# Altium PCB PCB.PcbDoc
Units mm, origin at the board's own origin, x right, y up, seen from the top; angles counter-clockwise.
Board outline 77 x 47 mm, 2 copper layers (Top Layer, Bottom Layer); 17 components, 25 nets, 82 pads, 0 vias.
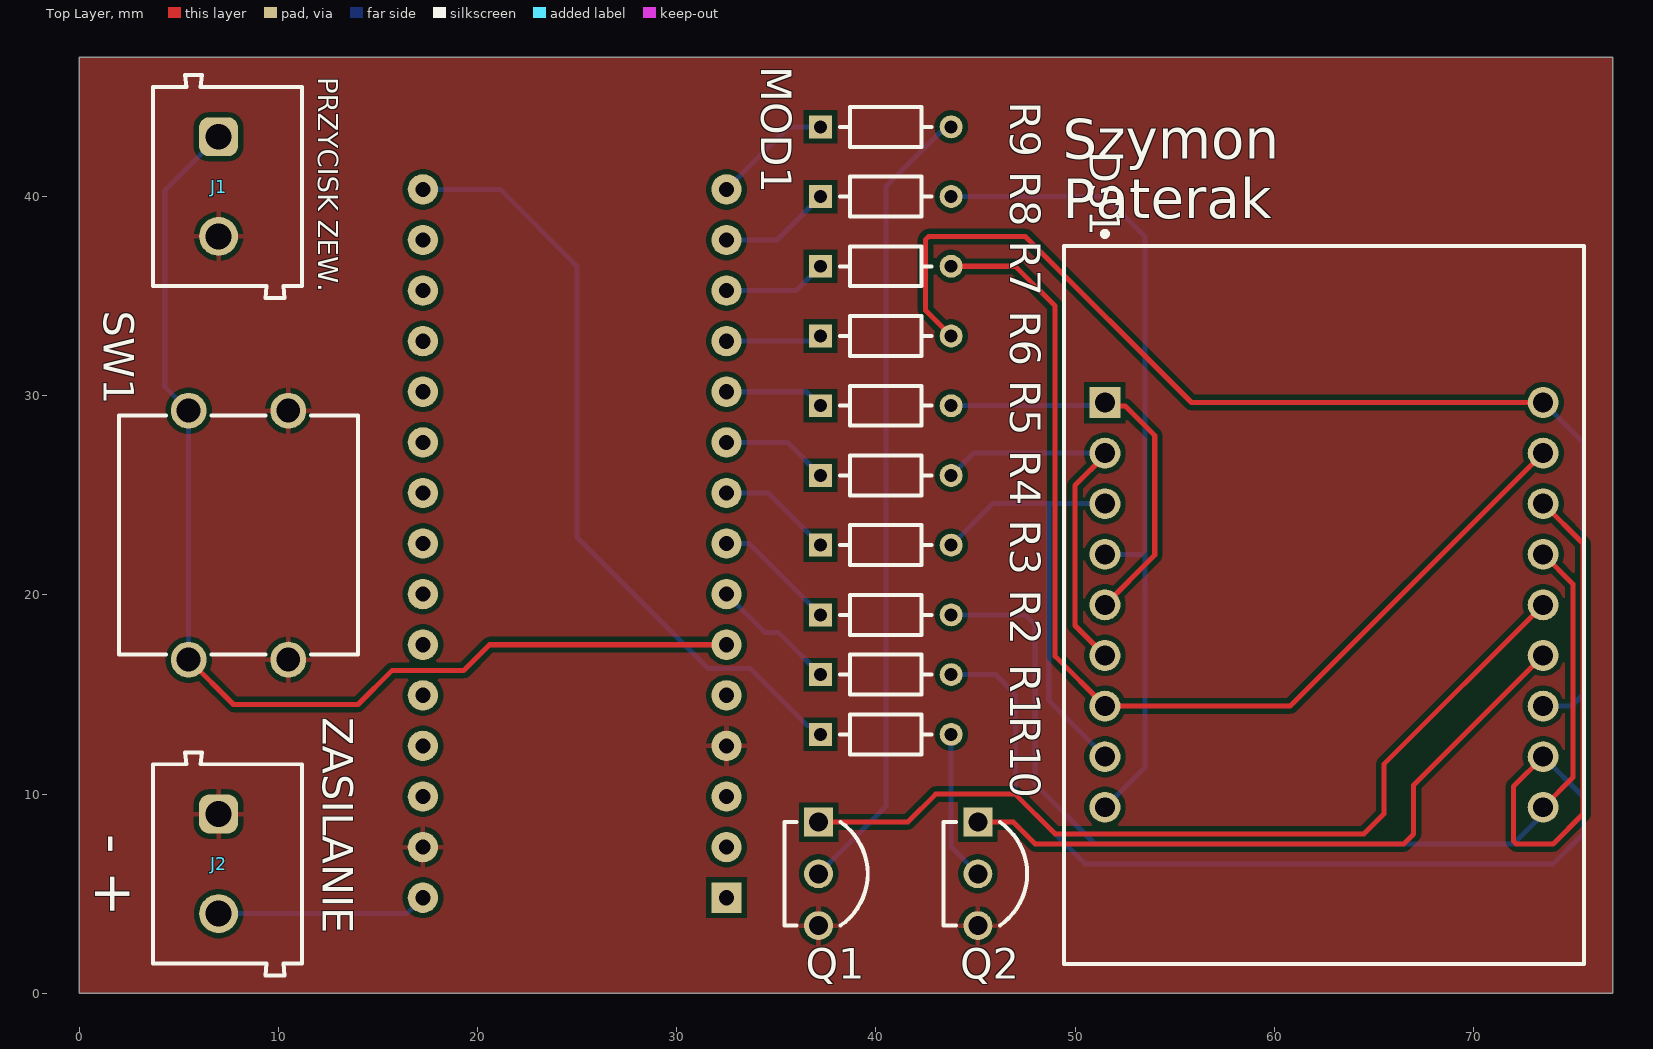
[diagram p0: Top Layer view]
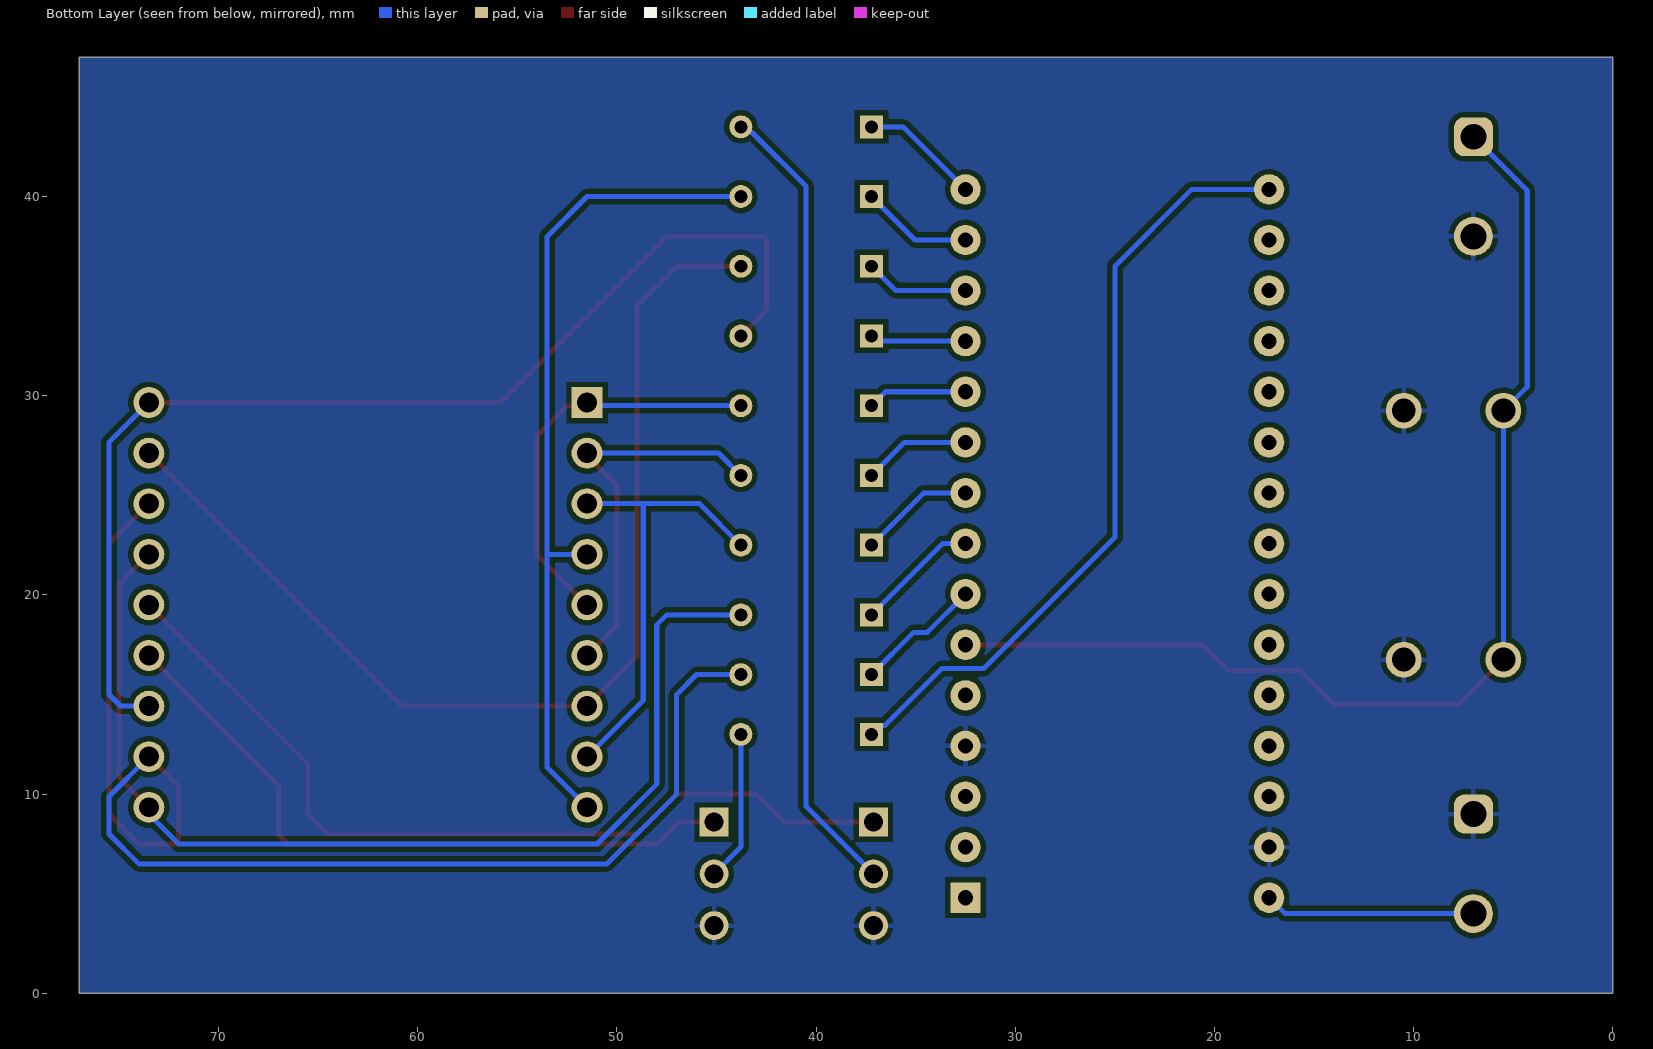
[diagram p1: Bottom Layer view, seen from below]
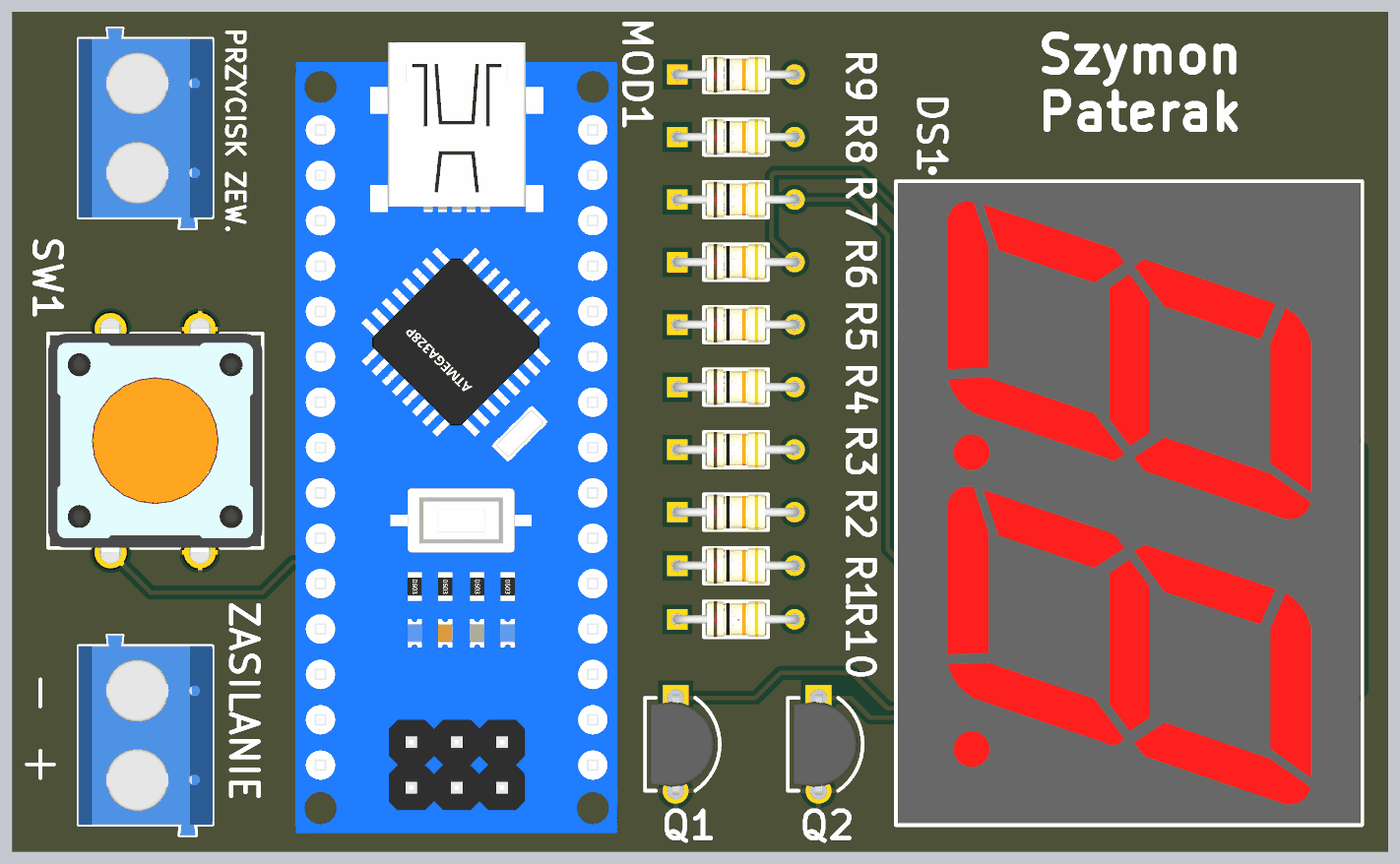
[diagram p2: 3D render of the assembled board from above, using the file's embedded part models]

## Layer stack, top to bottom
Top Solder: solder mask 0.0102, Solder Resist, Dk 3.5
Top Layer: signal copper 0.0356
Dielectric 1: dielectric 0.32, FR-4, Dk 4.8
Bottom Layer: signal copper 0.0356
Bottom Solder: solder mask 0.0102, Solder Resist, Dk 3.5

## Board outline
0,0 77,0 77,47 0,47

## Design rules (kind name [scope] priority, off if disabled: settings)
Clearance [All] p1: gap=0.254 ignorepadtopadclearanceinfootprint=FALSE except(0: Arc-Hole Track-Hole SMDPad-Hole THPad-Hole Via-Hole Fill-Hole Poly-Hole Region-Hole Text-Hole)
PolygonConnect [All] p1: connectstyle=Relief reliefconductorwidth=0.254 reliefentries=4 polygonreliefangle="90 Angle" airgapwidth=0.254
RoutingVias [All] p1: holewidth=0.711 width=1.27 viastyle="Through Hole" minholewidth=0.711 minwidth=1.27 maxholewidth=0.711 maxwidth=1.27
SolderMaskExpansion [All] p1: expansion=0.102 istentingtop=FALSE
Width [All] p1: maxlimit=0.254 minlimit=0.254 preferedwidth=0.254
30 further rules are at their usual default settings.

## Components (designator, comment, footprint, x,y, rotation, side; value= is the part's Value field where it differs from the comment)
DS1 "DC08-11SRWA" FP-DC08-11SRWA-MFG 62.5,19.5 r270 top
J1 "PRZYCISK ZEW." 691102710002 7.45,40.5 r270 top
J2 "ZASILANIE" 691102710002 7.45,6.5 r270 top
MOD1 "Arduino nano" "Arduino nano" 32.5,4.8 r90 top
Q1 "BC548CTA" FP-135AR-MFG 37.5,6 r0 top
Q2 "BC548CTA" FP-135AR-MFG 45.5,6 r0 top
R1 "1k" FP-CF18-MFG 40.5,16 r0 top value=10kΩ
R2 "1k" FP-CF18-MFG 40.5,19 r0 top value=10kΩ
R3 "1k" FP-CF18-MFG 40.5,22.5 r0 top value=10kΩ
R4 "1k" FP-CF18-MFG 40.5,26 r0 top value=10kΩ
R5 "1k" FP-CF18-MFG 40.5,29.5 r0 top value=10kΩ
R6 "1k" FP-CF18-MFG 40.5,33 r0 top value=10kΩ
R7 "1k" FP-CF18-MFG 40.5,36.5 r0 top value=10kΩ
R8 "1k" FP-CF18-MFG 40.5,40 r0 top value=10kΩ
R9 "1k" FP-CF18-MFG 40.5,43.5 r0 top value=10kΩ
R10 "1k" FP-CF18-MFG 40.5,13 r0 top value=10kΩ
SW1 "PRZYCISK" 4304x60437x6 8,23 r90 top

## Footprints (in the part's own frame and the unit in brackets; to place one, negate y for a bottom-side part, rotate by r counter-clockwise, add the part's x,y. Pads: shape width x height; smd on the part's side, far side on the other; paste and mask are expansions set on the pad)
4304x60437x6 [mm] "12x12mm washable Tact Switch, THT version"
  round 1.8 hole 1.2: A1(-6.25,2.5) A2(6.25,2.5) B1(-6.25,-2.5) B2(6.25,-2.5)
  silkscreen extent -6,-6 6,6, body extent -6.99,-6 6.99,6, height 4.35
691102710002 [mm] "5,00mm - modular - blue - Horizontal entry with pressure clamp - 9,9 mm height - 02p"
  rrect50% 1.95x1.95 hole 1.3: 1(-2.5,-0.45)
  round 1.95 hole 1.3: 2(2.5,-0.45)
  silkscreen extent -5.6,-3.75 5.6,3.75, body extent -5.6,-3.75 5.6,3.75, height 9.96
"Arduino nano" [mil] "arduino nano"
  rect 60x60 hole 30: 0(0,0)
  round 60 hole 30: 1(100,0) 2(200,0) 3(300,0) 4(400,0) 5(500,0) 6(600,0) 7(700,0) 8(800,0) 9(900,0) 10(1000,0) 11(1100,0) 12(1200,0) 13(1300,0) 14(1400,0) 15(1400,600) 16(1300,600) 17(1200,600) 18(1100,600) 19(1000,600) 20(900,600) 21(800,600) 22(700,600) 23(600,600) 24(500,600) 25(400,600) 26(300,600) 27(200,600) 28(100,600) 29(0,600)
  body extent -149,-54 1595,655, height 66
FP-135AR-MFG [mm]
  rect 1.45x1.45 hole 0.95 paste-2539.97 mask+0: 1(-0.38,2.6)
  round 1.45 hole 0.95 paste-2539.97 mask+0: 2(-0.38,0) 3(-0.38,-2.6)
  silkscreen extent -2.09,-2.6 2.09,2.6, body extent -2.19,-3.42 2.19,3.42, height 0.25
FP-CF18-MFG [mm]
  rect 1.15x1.15 hole 0.65 paste-2539.97 mask+0: 1(-3.28,0)
  round 1.15 hole 0.65 paste-2539.97 mask+0: 2(3.28,0)
  silkscreen extent -2.3,-1 2.3,1, body extent -3.96,-1.1 3.96,1.1, height 0.25
FP-DC08-11SRWA-MFG [mm]
  rect 1.55x1.55 hole 1 paste-2539.97 mask+0: 1(-10.16,-11)
  round 1.55 hole 1 paste-2539.97 mask+0: 2(-7.62,-11) 3(-5.08,-11) 4(-2.54,-11) 5(0,-11) 6(2.54,-11) 7(5.08,-11) 8(7.62,-11) 9(10.16,-11) 10(10.16,11) 11(7.62,11) 12(5.08,11) 13(2.54,11) 14(0,11) 15(-2.54,11) 16(-5.08,11) 17(-7.62,11) 18(-10.16,11)
  silkscreen extent -18.75,-13.05 18.03,13.05, body extent -18.13,-13.15 18.13,13.15, height 0.25

## Part data
DS1: library part CMP-44525-000001-1, "DISPLAY 660NM RED 2DIG 0.8\" 7SEG", Forward Current=20mA, Forward Voltage=1.85V, Manufacturer=Kingbright, Power Dissipation=75mW, Reverse Voltage=5V, Temperature="-40°C to +85°C", Temperature Range High=+85°C, Temperature Range Low=-40°C, Automotive=No, Category=Disp, ComponentLink2Description=Datasheet, ComponentLink2URL=https://www.kingbrightusa.com/images/catalog/SPEC/DC08-11SRWA.pdf, Device Class L1=Optoelectronics, Device Class L2=Displays, Device Class L3="LED Displays", Digikey Description="DISPLAY 660NM RED 2DIG 0.8\" 7SEG", Display Type=LED, Element Config="Common Cathode", Height=10.25mm, Lead Free=Yes, Luminous Intensity=32mcd, Manufacturer Part Number=DC08-11SRWA, Mouser Description="LED Displays & Accessories Dual Red 640nm Common Cathode", Octopart=https://octopart.com/dc08-11srwa-kingbright-55457135, Package=DC08-11SRWA, RoHS=TRUE, Test Current=20mA, Wavelength=640nm
J1 J2: library part CMP-1502-03258-2, Color=Blue, Current=15A, Max Operating Temperature=105°C, Min Operating Temperature=-40°C, Voltage=300V, Contact Material=Brass, Contact Plating=Tin, Current Rating=15A, Height=13.4mm, Housing Material=Nylon, Lead Pitch=5mm, Length=7.5mm, Mount="Through Hole", NexarPartId=8917706, Number Of Contacts=2, Number of Levels=1, Number of Pins=2, Number of Positions Per Level=2, Packaging=Box, Pitch=5.0038mm, Plating=Steel, REACH SVHC=Unknown, RoHS=Compliant, Stripping Length=-6mm, Termination=Screw, Voltage Rating=300V, Width=11.2mm, Wire Gauge (Max)=22AWG, Wire Gauge (Min)=14AWG, Wire/Cable Gauge=22AWG
MOD1: library part Arduino_nano
Q1 Q2: library part CMP-00278-84324566-1, "BC548CTA Small Signal Bipolar Transistor, 0.1A I(C), 30V V(BR)CEO, 1-Element, NPN, Silicon, TO-92", Case/Package=TO-92, Collector Base Voltage (VCBO)=30V, Collector Emitter Saturation Voltage=250mV, Current Rating=100mA, Emitter Base Voltage (VEBO)=5V, Frequency=300MHz, Manufacturer Lifecycle Status=ACTIVE, Max Junction Temperature (Tj)=150°C, Max Power Dissipation=500mW, Min Operating Temperature=-65°C, Collector Emitter Breakdown Voltage=30V, Collector Emitter Voltage (VCEO)=30V, Contact Plating=Tin, Element Configuration=Single, Gain Bandwidth Product=300MHz, Height=4.58mm, hFE Min=110, Lead Free="Lead Free", Length=4.58mm, Lifecycle Status=Production, Max Breakdown Voltage=30V, Max Collector Current=100mA, Max Frequency=300MHz, Max Operating Temperature=150°C, Mount="Through Hole", NexarPartId=84324566, Number of Elements=1, Number of Pins=3, Polarity=NPN, Power Dissipation=500mW, Radiation Hardening=No, REACH SVHC="No SVHC", RoHS=Compliant, Schedule B="8541210080, 8541210080", Transition Frequency=300MHz, Voltage Rating (DC)=30V, Weight=240mg, Width=3.86mm
R1 R2 R3 R4 R5 R6 R7 R8 R9 R10: library part CMP-26528-000002-1, "RES 10K OHM 1/8W 5% CF AXIAL", Manufacturer="Stackpole Electronics", Manufacturer Part Number=CF18JT10K0, Package=CF18, Power Rating=0.125W, Resistance=10kΩ, Temperature="-55°C to +155°C", Temperature Coefficient=0-500ppm/°C, Temperature Range High=+155°C, Temperature Range Low=-55°C, Tolerance=5%, Voltage Rating=250V, Automotive=No, Category=Res, ComponentLink2Description=Datasheet, ComponentLink2URL=http://www.seielect.com/Catalog/SEI-CF_CFM.pdf, Composition="Carbon Film", Device Class L1="Passive Components", Device Class L2=Resistors, Device Class L3="Through-Hole Resistors", Digikey Description="RES 10K OHM 1/8W 5% CF AXIAL", Height=2mm, Ipc Land Pattern Name=RESAD656W65L360D200, Lead Free=Yes, Octopart=https://octopart.com/cf18jt10k0-stackpole+electronics-19205642, RoHS=TRUE, Series=CF
SW1: library part CMP-1456-00007-2, Contact Current Rating=50mA, Insulation Resistance=100MΩ, Max Operating Temperature=85°C, Min Operating Temperature=-40°C, Voltage Rating=12V, Actuator Length=800µm, Actuator Material="Liquid Crystal Polymer, Polymer", Contact Material="Silver, Stainless Steel", Contact Plating=Silver, Current Rating=50mA, Height=4.3mm, Illumination Type="Illuminated, Non-Illuminated", Mechanical Life=500kcycles, Mount="Through Hole", NexarPartId=31136478, Packaging=Bulk, REACH SVHC="No SVHC", RoHS=Compliant, Switch Function=Off-Mom, Switch Travel=300µm, Termination="PC Pin", Throw Configuration=SPST

## Nets (pads, with @x,y where several pads share a name; then routed paths per layer and width w, separated by ;. In a path a pad name is that pad's centre, name@x,y a point inside that pad or via, vN(x,y) a via of type N, cw(c..) or ccw(c..) an arc to the next point about the centre after c; other vN are vias at no path point)
GND: J1.2 J2.1 MOD1.3 MOD1.28 Q1.3 Q2.3 SW1.B1 SW1.B2
NetDS1_1: DS1.1 DS1.5 R5.2 | length 20.5
  Top Layer w0.254: DS1.5 54,22 54,28 52.507,29.493 51.667,29.493 DS1.1
  Bottom Layer w0.254: R5.2 51.34,29.5 DS1.1
NetDS1_2: DS1.2 DS1.6 R4.2 | length 19.6
  Top Layer w0.254: DS1.6 50,18.46 50,25.5 51.5,27 DS1.2
  Bottom Layer w0.254: R4.2 44.9,27.12 DS1.2
NetDS1_3: DS1.3 DS1.8 R3.2 | length 22.4
  Bottom Layer w0.254: R3.2 45.86,24.58 48.68,24.58 ; DS1.8 48.68,14.7 48.68,24.58 ; DS1.3 48.68,24.58
NetDS1_4: DS1.4 DS1.9 R8.2 | length 42
  Bottom Layer w0.254: R8.2 51.5,40 53.5,38 53.5,22.04 ; DS1.9 53.5,11.34 53.5,22.04 ; DS1.4 53.5,22.04
NetDS1_7: DS1.7 DS1.17 R7.2 | length 54.4
  Top Layer w0.254: R7.2 47,36.5 49,34.5 49,16.92 DS1.7 60.8,14.42 DS1.17
NetDS1_10: DS1.10 DS1.15 R2.2 | length 54.1
  Top Layer w0.254: DS1.10 74.992,10.832 74.992,20.548 DS1.15
  Bottom Layer w0.254: R2.2 47.5,19 48,18.5 48,10.5 51,7.5 72,7.5 73.5,9 DS1.10
NetDS1_11: DS1.11 DS1.16 R1.2 | length 69.4
  Top Layer w0.254: DS1.11 72,10.38 72,7.649 72.149,7.5 74,7.5 75.5,9 75.5,22.58 DS1.16
  Bottom Layer w0.254: R1.2 46,16 47,15 47,10 50.5,6.5 74,6.5 75.5,8 75.5,9.88 DS1.11
NetDS1_12: DS1.12 DS1.18 R6.2 | length 57.6
  Top Layer w0.254: R6.2 42.5,34.28 42.5,37.851 42.649,38 47.5,38 55.84,29.66 DS1.18
  Bottom Layer w0.254: DS1.12 74.92,14.42 75.5,15 75.5,27.66 DS1.18
NetDS1_13: DS1.13 Q2.1 | length 34.2
  Top Layer w0.254: Q2.1 46.9,8.6 48,7.5 66.5,7.5 67,8 67,10.46 DS1.13
NetDS1_14: DS1.14 Q1.1 | length 44
  Top Layer w0.254: Q1.1 41.6,8.6 43,10 47,10 48.992,8.008 64.508,8.008 65.5,9 65.5,11.5 DS1.14
NetJ1_1: J1.1 MOD1.5 SW1.A1 SW1.A2 | length 57
  Top Layer w0.254: SW1.A1 7.75,14.5 14,14.5 15.7,16.2 19.3,16.2 20.6,17.5 MOD1.5
  Bottom Layer w0.254: SW1.A1 SW1.A2 4.3,30.45 4.3,40.3 J1.1
NetMOD1_6: MOD1.6 R1.1 | length 6.4
  Bottom Layer w0.254: MOD1.6 34.418,18.122 35.097,18.122 R1.1
NetMOD1_7: MOD1.7 R2.1 | length 6.2
  Bottom Layer w0.254: MOD1.7 32.503,22.577 33.643,22.577 R2.1
NetMOD1_8: MOD1.8 R3.1 | length 5.8
  Bottom Layer w0.254: MOD1.8 34.6,25.12 R3.1
NetMOD1_9: MOD1.9 R4.1 | length 5.4
  Bottom Layer w0.254: MOD1.9 35.56,27.66 R4.1
NetMOD1_10: MOD1.10 R5.1 | length 5
  Bottom Layer w0.254: MOD1.10 36.52,30.2 R5.1
NetMOD1_11: MOD1.11 R6.1 | length 4.8
  Bottom Layer w0.254: MOD1.11 36.96,32.74 R6.1
NetMOD1_12: MOD1.12 R7.1 | length 5.2
  Bottom Layer w0.254: MOD1.12 36,35.28 R7.1
NetMOD1_13: MOD1.13 R8.1 | length 5.6
  Bottom Layer w0.254: MOD1.13 35.04,37.82 R8.1
NetMOD1_14: MOD1.14 R9.1 | length 6
  Bottom Layer w0.254: MOD1.14 35.64,43.5 R9.1
NetMOD1_15: MOD1.15 R10.1 | length 39.3
  Bottom Layer w0.254: MOD1.15 21.14,40.36 25,36.5 25,22.9 31.6,16.3 33.7,16.3 36.552,13.448 36.772,13.448 R10.1
NetQ1_2: Q1.2 R9.2 | length 40.4
  Bottom Layer w0.254: Q1.2 40.5,9.38 40.5,40.5 43.218,43.218 43.256,43.218 43.538,43.5 R9.2
NetQ2_2: Q2.2 R10.2 | length 7.6
  Bottom Layer w0.254: R10.2 43.78,7.34 Q2.2
Vin: J2.2 MOD1.29 | length 10.6
  Bottom Layer w0.254: J2.2 16.444,4 17.244,4.8 MOD1.29
pads on no net: MOD1.0 MOD1.1 MOD1.2 MOD1.4 MOD1.16 MOD1.17 MOD1.18 MOD1.19 MOD1.20 MOD1.21 MOD1.22 MOD1.23 MOD1.24 MOD1.25 MOD1.26 MOD1.27

## Polygon pours and split planes (outlines as drawn)
GND on Top Layer "GND_L01_P001" (solid, remove dead copper, pour order 1): 0,0 0,47 77,47 77,0
GND on Bottom Layer "GND_L02_P000" (solid, remove dead copper, pour order 0): 0,0 0,47 77,47 77,0

## Silkscreen, mask and mechanical layers (free items; w line width, h text height)
Top Overlay:
  text "Szymon / Paterak" at 49.371,38.9 h2
  text "+ -" at 0.8,3.834 h2 r270